# EAGLE board exo_sequencer (EAGLE 8.0.0)
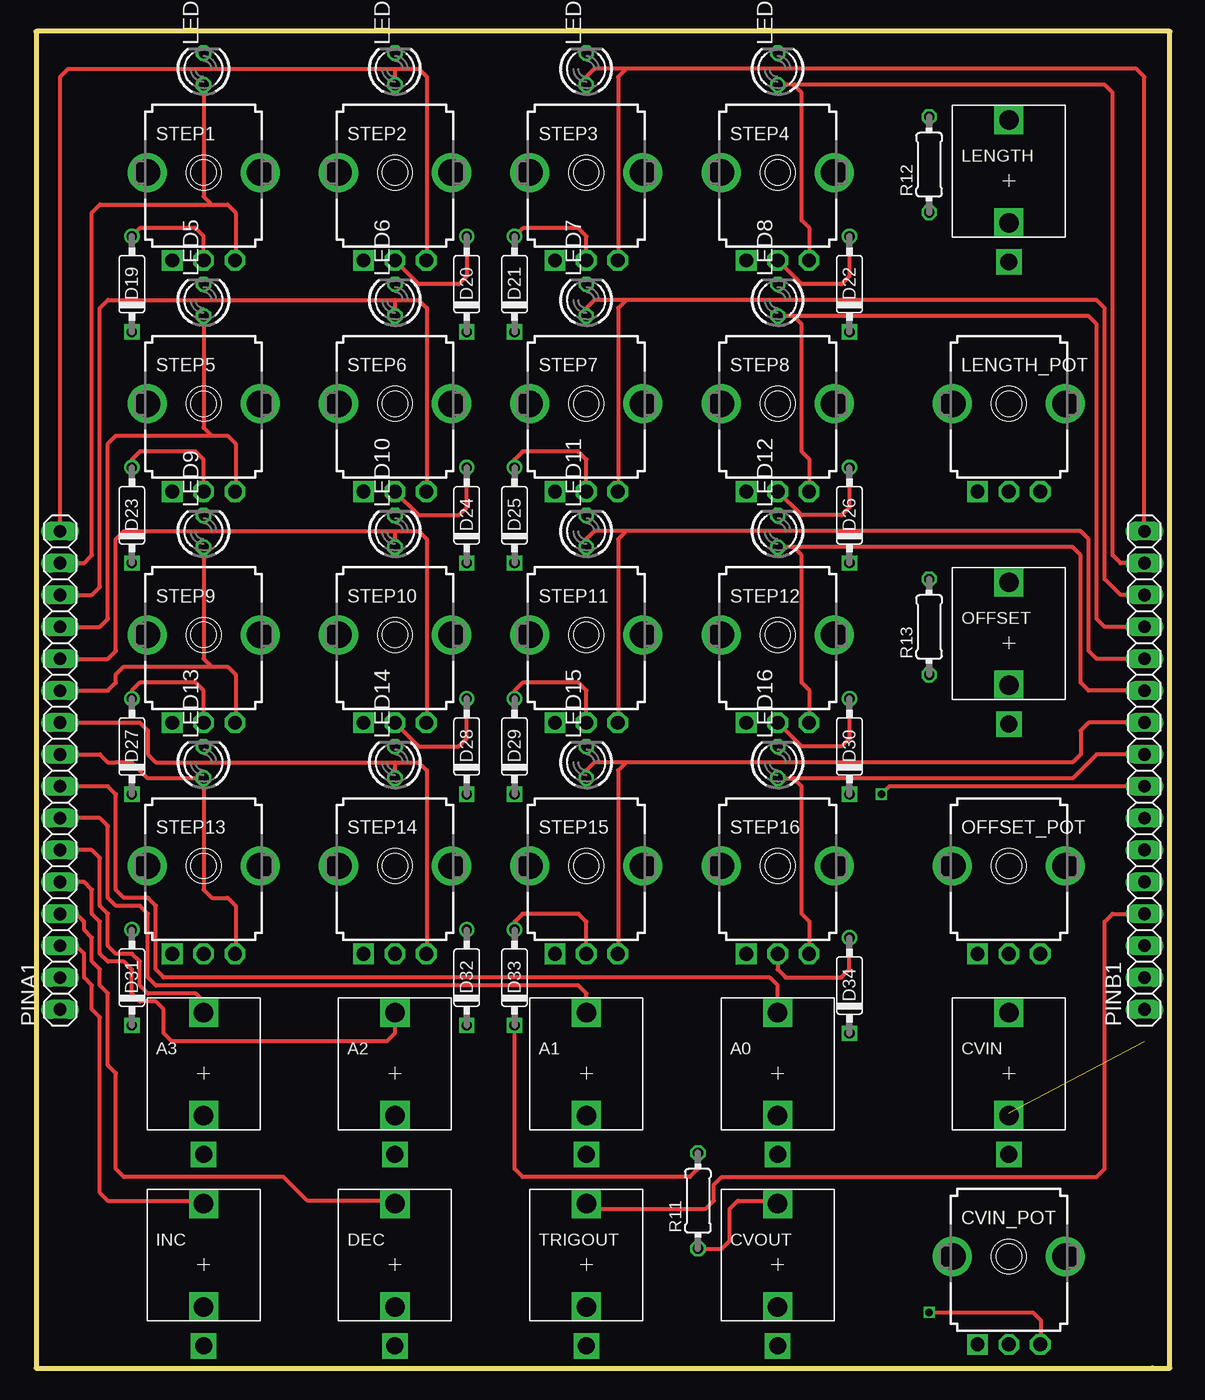
[diagram p0: board, top side]
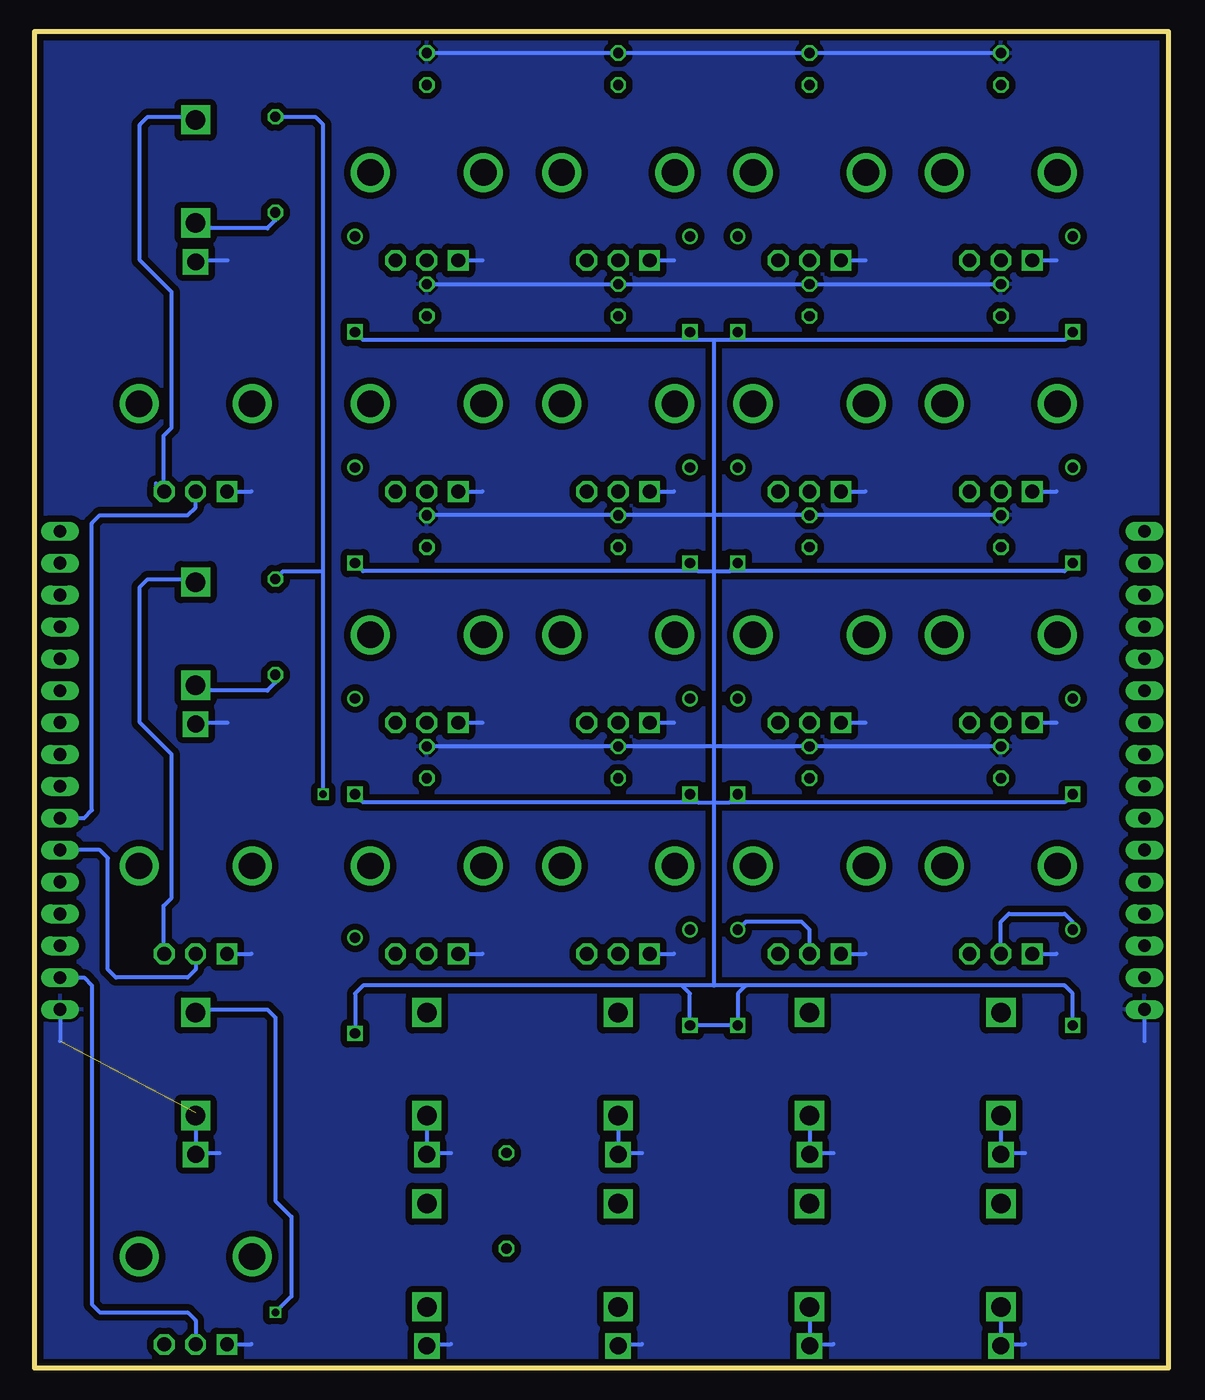
[diagram p1: board, bottom side, seen from below]

Size 90.3 x 106.5 mm. Coordinates in mm from the lower left corner, seen from the top.
Outline: 0,0 88.9,0 90.3,0 90.3,106.5 0,106.5 0,0
Copper layers (1*16): Top 0.035559375mm / dielectric 1.6mm / Bottom 0.035559375mm
Design rules "oshpark-2layer": minimum track width 6mil, minimum drill 10mil, track to track 6mil, track to pad 6mil, pad to pad 6mil, via to via 6mil, smd to smd 6mil, copper to edge 15mil, drill to drill 6mil, minimum pad ring 5mil, minimum via ring 5mil, stop-mask expansion 2.5mil, vias tented up to drill 0mil, thermal gap 10mil

## Footprints (pad centres in the part's own frame; a part is rotated, then mirrored left to right if it is on the bottom)
THONKICONN = drill 1.35 square: P$1_SLEEVE 0,-6.48 | drill 1.55 square: P$2_SWITCH 0,-3.38; P$3_TIP 0,4.84
9MM_SNAP-IN_POT = drill 1.1 square: 1 -2.5,-7 | drill 1.1 octagon: 2 0,-7; 3 2.5,-7 | drill 2.1 pad 2.794: CHASSIS1 -4.5,0; CHASSIS2 4.5,0
DO35-7 = drill 0.813: A 3.81,0 | drill 0.813 square: C -3.81,0
LED3MM = drill 0.813 octagon: A -1.27,0; K 1.27,0
1X16 = drill 1.016 long: 1 -19.05,0; 2 -16.51,0; 3 -13.97,0; 4 -11.43,0; 5 -8.89,0; 6 -6.35,0; 7 -3.81,0; 8 -1.27,0; 9 1.27,0; 10 3.81,0; 11 6.35,0; 12 8.89,0; 13 11.43,0; 14 13.97,0; 15 16.51,0; 16 19.05,0
0204/7 = drill 0.813 octagon: 1 -3.81,0; 2 3.81,0

## Placement (x,y rotation side)
A0  [THONKICONN]  59.05,23.5 0 top
A1  [THONKICONN]  43.81,23.5 0 top
A2  [THONKICONN]  28.57,23.5 0 top
A3  [THONKICONN]  13.34,23.5 0 top
CVIN  [THONKICONN]  77.47,23.5 0 top
CVIN_POT  [9MM_SNAP-IN_POT]  77.47,8.89 0 top
CVOUT  [THONKICONN]  59.05,8.26 0 top
D19  [DO35-7]  7.62,86.36 90 top
D20  [DO35-7]  34.29,86.36 90 top
D21  [DO35-7]  38.1,86.36 90 top
D22  [DO35-7]  64.77,86.36 90 top
D23  [DO35-7]  7.62,67.94 90 top
D24  [DO35-7]  34.29,67.94 90 top
D25  [DO35-7]  38.1,67.94 90 top
D26  [DO35-7]  64.77,67.94 90 top
D27  [DO35-7]  7.62,49.53 90 top
D28  [DO35-7]  34.29,49.53 90 top
D29  [DO35-7]  38.1,49.53 90 top
D30  [DO35-7]  64.77,49.53 90 top
D31  [DO35-7]  7.62,31.11 90 top
D32  [DO35-7]  34.29,31.11 90 top
D33  [DO35-7]  38.1,31.11 90 top
D34  [DO35-7]  64.77,30.48 90 top
DEC  [THONKICONN]  28.57,8.26 0 top
INC  [THONKICONN]  13.34,8.26 0 top
LED1  [LED3MM]  13.34,103.5 90 top
LED2  [LED3MM]  28.57,103.5 90 top
LED3  [LED3MM]  43.81,103.5 90 top
LED4  [LED3MM]  59.05,103.5 90 top
LED5  [LED3MM]  13.34,85.09 90 top
LED6  [LED3MM]  28.57,85.09 90 top
LED7  [LED3MM]  43.81,85.09 90 top
LED8  [LED3MM]  59.05,85.09 90 top
LED9  [LED3MM]  13.34,66.67 90 top
LED10  [LED3MM]  28.57,66.67 90 top
LED11  [LED3MM]  43.81,66.67 90 top
LED12  [LED3MM]  59.05,66.67 90 top
LED13  [LED3MM]  13.34,48.26 90 top
LED14  [LED3MM]  28.57,48.26 90 top
LED15  [LED3MM]  43.81,48.26 90 top
LED16  [LED3MM]  59.05,48.26 90 top
LENGTH  [THONKICONN]  77.47,94.61 0 top
LENGTH_POT  [9MM_SNAP-IN_POT]  77.47,76.83 0 top
OFFSET  [THONKICONN]  77.47,57.78 0 top
OFFSET_POT  [9MM_SNAP-IN_POT]  77.47,40.01 0 top
PINA1  [1X16]  1.91,47.62 90 top
PINB1  [1X16]  88.27,47.62 90 top
R11  [0204/7]  52.7,13.34 90 top
R12  [0204/7]  71.12,95.89 90 top
R13  [0204/7]  71.12,59.05 90 top
STEP1  [9MM_SNAP-IN_POT]  13.34,95.25 0 top
STEP2  [9MM_SNAP-IN_POT]  28.57,95.25 0 top
STEP3  [9MM_SNAP-IN_POT]  43.81,95.25 0 top
STEP4  [9MM_SNAP-IN_POT]  59.05,95.25 0 top
STEP5  [9MM_SNAP-IN_POT]  13.34,76.83 0 top
STEP6  [9MM_SNAP-IN_POT]  28.57,76.83 0 top
STEP7  [9MM_SNAP-IN_POT]  43.81,76.83 0 top
STEP8  [9MM_SNAP-IN_POT]  59.05,76.83 0 top
STEP9  [9MM_SNAP-IN_POT]  13.34,58.42 0 top
STEP10  [9MM_SNAP-IN_POT]  28.57,58.42 0 top
STEP11  [9MM_SNAP-IN_POT]  43.81,58.42 0 top
STEP12  [9MM_SNAP-IN_POT]  59.05,58.42 0 top
STEP13  [9MM_SNAP-IN_POT]  13.34,40.01 0 top
STEP14  [9MM_SNAP-IN_POT]  28.57,40.01 0 top
STEP15  [9MM_SNAP-IN_POT]  43.81,40.01 0 top
STEP16  [9MM_SNAP-IN_POT]  59.05,40.01 0 top
TRIGOUT  [THONKICONN]  43.81,8.26 0 top

## Library data of the parts
A0 A1-A3 CVIN CVIN_POT CVOUT D19-D34 DEC INC LENGTH LENGTH_POT OFFSET OFFSET_POT STEP1-STEP16 TRIGOUT = MusicThingModular
LED1-LED16 = led
PINA1 PINB1 = pinhead
R11-R13 = rcl

## Nets
G: LED1.K LED4.K LED5.K LED8.K LED9.K LED12.K LED13.K LED16.K PINA1.1 PINB1.1
S$1: LED2.A PINA1.16
S$2: LED1.A PINA1.15
S$3: LED6.A
S$4: LED5.A
S$5: LED10.A PINA1.12
S$6: LED16.A PINB1.9
S$7: LED14.A PINA1.10
S$8: LED13.A PINA1.9
S$9: LED9.A PINA1.11
S$10: LED3.A PINB1.16
S$11: LED7.A PINB1.14
S$12: LED4.A PINB1.15
S$13: LED11.A PINB1.12
S$14: LED8.A PINB1.13
S$15: D19.A
S$16: LED12.A PINB1.11
S$17: LED15.A
S$18: D21.A
S$19: D24.A
S$20: D25.A
S$21: D29.A
S$22: D28.A
S$23: D33.A
S$24: D34.A
S$25: D22.A
S$26: D31.A
S$27: D26.A
S$28: D23.A
S$29: D32.A
S$30: D20.A
S$31: D27.A
S$32: PINA1.6
S$33: PINA1.7
S$35: D27.C D28.C D29.C D30.C
S$36: D30.A
S$37: PINA1.8
S$38: D23.C D24.C D25.C D26.C
S$39: PINA1.5
S$40: PINA1.3
S$42: PINB1.6
S$43: R12.1
S$44: R11.1
S$45: PINB1.2
S$46: PINB1.4
S$47: PINA1.4
S$48: R13.1
S$49: PINB1.8 R12.2 R13.2
S$92: D19.C D20.C D21.C D22.C D31.C D32.C D33.C D34.C R11.2

## Tracks (layer width: path | path; a pad name or v marks a point on that pad's centre or on a via)
G  (1 unrouted)
  Bottom 0.305: 11.43,88.27 8.89,88.27 | 26.04,88.27 24.13,88.27 | 41.27,88.27 39.37,88.27 | 56.52,88.27 54.61,88.27 | 77.47,88.27 74.93,88.27 | 74.93,69.85 73.03,69.85 | 56.52,69.85 54.61,69.85 | 41.27,69.85 39.37,69.85 | 26.04,69.85 24.13,69.85 | 10.79,69.85 8.89,69.85 | 10.79,51.44 8.89,51.44 | 26.04,51.44 24.13,51.44 | 41.27,51.44 39.37,51.44 | 56.52,51.44 54.61,51.44 | 77.47,51.44 74.93,51.44 | 75.56,33.02 73.03,33.02 | 57.15,33.02 54.61,33.02 | 41.27,33.02 39.37,33.02 | 26.04,33.02 24.13,33.02 | 10.79,33.02 8.89,33.02 | 77.47,20.32 77.47,17.14 75.56,17.14 | PINB1.1 88.27,26.04 | 59.05,20.32 59.05,17.14 57.15,17.14 | 43.81,20.32 43.81,17.14 41.91,17.14 | 28.57,20.32 28.57,17.14 26.67,17.14 | 13.34,20.32 13.34,17.14 11.43,17.14 | 59.05,1.91 57.15,1.91 | 43.81,1.91 41.91,1.91 | 28.57,5.08 28.57,1.91 26.67,1.91 | 13.34,5.08 13.34,1.91 11.43,1.91 | PINA1.1 1.91,26.04 | 74.93,1.91 73.03,1.91 | LED13.K LED16.K | LED9.K LED12.K | LED8.K LED5.K | LED1.K LED4.K
  pour Bottom (isolate 0.508): 0,106.68 90.17,106.68 90.17,0 0,0
S$1
  Top 0.305: PINA1.16 1.91,102.87 2.54,103.5 28.57,103.5 | 28.57,103.5 30.48,103.5 31.11,102.87 31.11,88.27 | 28.57,103.5 LED2.A
S$2
  Top 0.305: PINA1.15 3.81,64.14 4.45,64.77 4.45,92.08 5.08,92.71 13.97,92.71 | 13.97,92.71 15.24,92.71 15.88,92.08 15.88,88.27 | LED1.A 13.34,93.34 13.97,92.71
S$3
  Top 0.305: 2.54,61.59 4.45,61.59 5.08,62.23 5.08,84.45 5.71,85.09 28.57,85.09 | 28.57,85.09 30.48,85.09 31.11,84.45 31.11,69.85 | 28.57,85.09 LED6.A
S$4
  Top 0.305: 2.54,59.05 5.08,59.05 5.71,59.69 5.71,73.66 6.35,74.3 13.97,74.3 | 13.97,74.3 15.24,74.3 15.88,73.66 15.88,69.85 | LED5.A 13.34,74.93 13.97,74.3
S$5
  Top 0.305: PINA1.12 5.71,56.52 6.35,57.15 6.35,66.04 6.99,66.67 28.57,66.67 | 28.57,66.67 30.48,66.67 31.11,66.04 31.11,51.44 | 28.57,66.67 LED10.A
S$6
  Top 0.305: 61.59,32.38 61.59,35.56 60.96,36.2 60.96,46.35 60.33,46.99 | PINB1.9 84.45,48.9 82.55,46.99 60.33,46.99 | LED16.A 59.69,46.99 60.33,46.99
S$7
  Top 0.305: PINA1.10 8.26,51.44 8.89,50.8 8.89,48.9 9.53,48.26 28.57,48.26 | 28.57,48.26 30.48,48.26 31.11,47.62 31.11,33.02 | 28.57,48.26 LED14.A
S$8
  Top 0.305: 15.88,33.02 15.88,36.83 15.24,37.47 13.97,37.47 13.34,38.1 LED13.A 8.89,46.99 7.62,48.26 6.35,48.26 5.71,48.26 5.08,48.9 PINA1.9
S$9
  Top 0.305: PINA1.11 5.71,53.98 6.35,54.61 6.35,55.24 6.99,55.88 13.97,55.88 | 13.97,55.88 15.24,55.88 15.88,55.24 15.88,51.44 | LED9.A 13.34,56.52 13.97,55.88
S$10
  Top 0.305: PINB1.16 88.27,102.87 87.63,103.5 46.99,103.5 | 46.99,103.5 46.35,102.87 46.35,88.27 | 46.99,103.5 44.45,103.5 43.81,102.87 LED3.A
S$11
  Top 0.305: PINB1.14 86.36,61.59 85.09,62.87 85.09,84.45 84.45,85.09 46.99,85.09 | 46.99,85.09 46.35,84.45 46.35,69.85 | 46.99,85.09 44.45,85.09 43.81,84.45 LED7.A
S$12
  Top 0.305: 61.59,88.27 61.59,90.81 60.96,91.44 60.96,101.6 60.33,102.23 | PINB1.15 86.36,64.14 85.72,64.77 85.72,101.6 85.09,102.23 60.33,102.23 | 60.33,102.23 LED4.A
S$13
  Top 0.305: PINB1.12 84.45,56.52 83.82,57.15 83.82,66.04 83.19,66.67 46.99,66.67 | 46.99,66.67 46.35,66.04 46.35,51.44 | 46.99,66.67 44.45,66.67 43.81,66.04 LED11.A
S$14
  Top 0.305: 61.59,69.85 61.59,72.39 60.96,73.03 60.96,83.19 60.33,83.82 | PINB1.13 85.09,59.05 84.45,59.69 84.45,83.19 83.82,83.82 60.33,83.82 | 60.33,83.82 LED8.A
S$15
  Top 0.305: 13.34,88.27 13.34,90.17 12.7,90.81 8.26,90.81 D19.A
S$16
  Top 0.305: 61.59,51.44 61.59,53.98 60.96,54.61 60.96,64.77 60.33,65.41 | PINB1.11 83.82,53.98 83.19,54.61 83.19,64.77 82.55,65.41 60.33,65.41 | 60.33,65.41 LED12.A
S$17
  Top 0.305: 88.9,51.44 83.82,51.44 83.19,50.8 83.19,48.9 82.55,48.26 46.99,48.26 | 46.99,48.26 46.35,47.62 46.35,33.02 | 46.99,48.26 44.45,48.26 43.81,47.62 LED15.A
S$18
  Top 0.305: 43.81,88.27 43.81,90.17 43.18,90.81 38.73,90.81 D21.A
S$19
  Top 0.305: 28.57,69.85 30.48,67.94 33.66,67.94 34.29,68.58 D24.A
S$20
  Top 0.305: 43.81,69.85 43.81,72.39 43.18,73.03 38.73,73.03 38.1,72.39 D25.A
S$21
  Top 0.305: 43.81,51.44 43.81,53.98 43.18,54.61 38.73,54.61 38.1,53.98 D29.A
S$22
  Top 0.305: 28.57,51.44 30.48,49.53 33.66,49.53 34.29,50.16 D28.A
S$23
  Top 0.305: 43.81,33.02 43.81,35.56 43.18,36.2 38.73,36.2 38.1,35.56 D33.A
S$24
  Top 0.305: 59.05,33.02 59.05,31.75 59.69,31.11 64.14,31.11 64.77,31.75 D34.A
S$25
  Top 0.305: D22.A 64.77,87 64.14,86.36 60.96,86.36 59.05,88.27
S$26
  Bottom 0.305: 13.34,33.02 13.34,35.56 12.7,36.2 8.26,36.2 7.62,35.56 D31.A
S$27
  Top 0.305: D26.A 64.77,68.58 64.14,67.94 60.96,67.94 59.05,69.85
S$28
  Top 0.305: 13.34,69.85 13.34,72.39 12.7,73.03 8.26,73.03 7.62,72.39 D23.A
S$29
  Bottom 0.305: 28.57,33.02 28.57,34.92 29.21,35.56 33.66,35.56 D32.A
S$30
  Top 0.305: D20.A 34.29,87 33.66,86.36 30.48,86.36 28.57,88.27
S$31
  Top 0.305: 13.34,51.44 13.34,53.98 12.7,54.61 8.26,54.61 7.62,53.98 D27.A
S$32
  Top 0.305: 13.34,28.57 13.34,29.21 12.7,29.84 8.89,29.84 8.26,30.48 8.26,32.38 7.62,33.02 6.35,33.02 5.71,33.66 5.71,36.2 5.08,36.83 5.08,40.64 4.45,41.27 PINA1.6
S$33
  Top 0.305: 43.81,28.57 43.81,29.84 43.18,30.48 9.53,30.48 8.89,31.11 8.89,36.2 8.26,36.83 6.35,36.83 5.71,37.47 5.71,43.18 5.08,43.81 PINA1.7
S$35
  Bottom 0.305: D30.C 64.14,45.09 38.1,45.09 37.47,45.09 | D29.C 37.47,45.09 | D27.C 8.26,45.09 34.92,45.09 | D28.C 34.92,45.09 | 37.47,45.09 34.92,45.09
S$36
  Top 0.305: D30.A 64.77,50.16 64.14,49.53 60.96,49.53 59.05,51.44
S$37
  Top 0.305: 59.05,28.57 59.05,30.48 58.42,31.11 10.16,31.11 9.53,31.75 9.53,36.83 8.89,37.47 6.99,37.47 6.35,38.1 6.35,45.72 5.71,46.35 PINA1.8
S$38
  Bottom 0.305: D26.C 64.14,63.5 37.47,63.5 | D25.C 37.47,63.5 | D23.C 8.26,63.5 34.92,63.5 | D24.C 34.92,63.5 | 37.47,63.5 34.92,63.5
S$39
  Top 0.305: 28.57,28.57 28.57,26.67 27.94,26.04 10.79,26.04 10.16,26.67 10.16,28.57 9.53,29.21 8.26,29.21 7.62,29.84 7.62,31.75 6.99,32.38 5.71,32.38 5.08,33.02 5.08,35.56 4.45,36.2 4.45,38.1 3.81,38.73 PINA1.5
S$40
  Top 0.305: 13.34,13.34 5.71,13.34 5.08,13.97 5.08,27.94 4.45,28.57 4.45,30.48 3.81,31.11 3.81,33.02 3.17,33.66 PINA1.3
S$41
  Bottom 0.305: 88.9,43.81 86.36,43.81 85.72,44.45 85.72,67.31 85.09,67.94 78.11,67.94 77.47,68.58 77.47,69.85
S$42
  Bottom 0.305: 77.47,33.02 77.47,31.75 78.11,31.11 83.82,31.11 84.45,31.75 84.45,40.64 85.09,41.27 PINB1.6
S$43
  Bottom 0.305: R12.1 71.12,91.44 71.75,90.81 76.83,90.81 77.47,91.44
S$44
  Top 0.305: R11.1 54.61,9.53 55.24,10.16 55.24,12.7 55.88,13.34 59.05,13.34
S$45
  Bottom 0.305: PINB1.2 86.36,31.11 85.72,30.48 85.72,5.08 85.09,4.45 78.11,4.45 77.47,3.81 77.47,1.91
S$46
  Top 0.305: 43.81,12.7 53.34,12.7 53.98,13.34 53.98,14.61 54.61,15.24 84.45,15.24 85.09,15.88 85.09,35.56 85.72,36.2 PINB1.4
S$47
  Top 0.305: 28.57,13.34 21.59,13.34 19.68,15.24 6.99,15.24 6.35,15.88 6.35,23.5 5.71,24.13 5.71,29.84 5.08,30.48 5.08,31.75 4.45,32.38 4.45,34.29 3.81,34.92 3.81,35.56 3.17,36.2 PINA1.4
S$48
  Bottom 0.305: R13.1 71.12,54.61 71.75,53.98 76.83,53.98 77.47,54.61
S$49  (via drill 0.6)
  Top 0.305: PINB1.8 67.94,46.35 v67.31,45.72
  Bottom 0.305: R13.2 70.48,63.5 67.31,63.5 | R12.2 67.94,99.69 67.31,99.06 67.31,63.5 | v67.31,45.72 67.31,63.5
S$59
  Bottom 0.305: 80.64,70.48 80.64,69.85
S$60
  Bottom 0.305: 80.01,69.85 80.01,74.3 79.38,74.93 79.38,85.72 81.92,88.27 81.92,99.06 81.28,99.69 77.47,99.69
S$61
  Bottom 0.305: 80.01,33.02 80.01,36.83 79.38,37.47 79.38,48.9 81.92,51.44 81.92,62.23 81.28,62.87 77.47,62.87
S$83  (via drill 0.6)
  Top 0.305: v71.12,4.45 79.38,4.45 80.01,3.81 80.01,1.91
  Bottom 0.305: 77.47,28.57 71.75,28.57 71.12,27.94 71.12,13.34 69.85,12.06 69.85,5.71 v71.12,4.45
S$92
  Top 0.305: R11.2 52.7,15.88 52.07,15.24 38.73,15.24 38.1,15.88 D33.C
  Bottom 0.305: D19.C 8.26,81.92 34.92,81.92 | 34.92,81.92 36.2,81.92 | 36.2,81.92 37.47,81.92 | 37.47,81.92 64.14,81.92 D22.C | D20.C 34.92,81.92 | D21.C 37.47,81.92 | D34.C 64.77,29.84 64.14,30.48 38.73,30.48 | 38.73,30.48 38.1,29.84 D33.C D32.C 34.29,29.84 33.66,30.48 | 33.66,30.48 36.2,30.48 | 36.2,30.48 38.73,30.48 | 33.66,30.48 8.26,30.48 7.62,29.84 D31.C | 36.2,81.92 36.2,30.48